# EAGLE board motor-board (EAGLE 9.4.0)
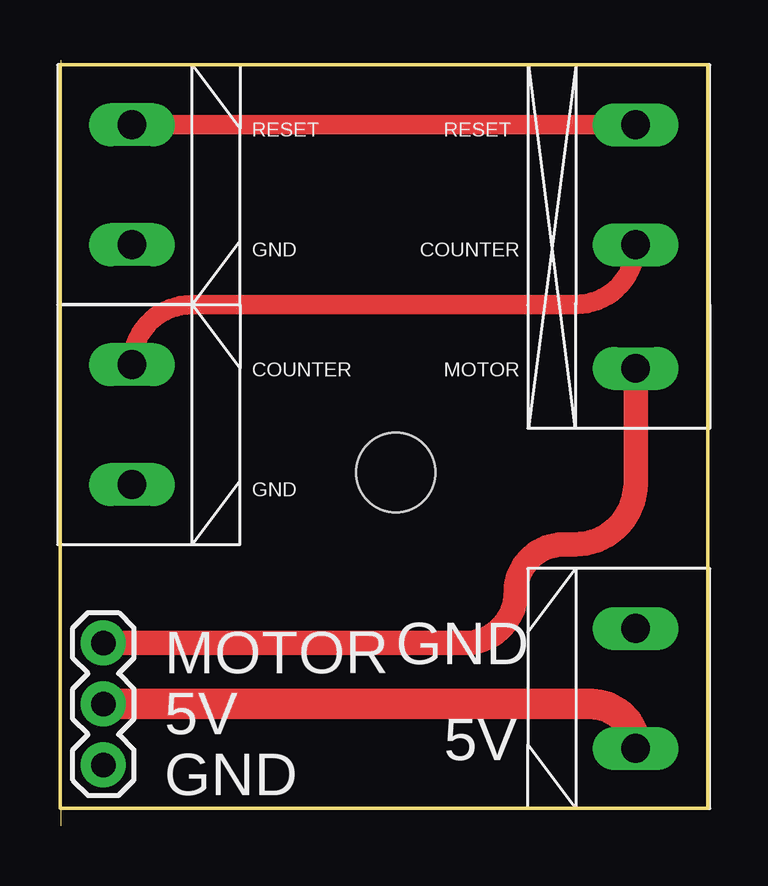
[diagram p0: board, top side]
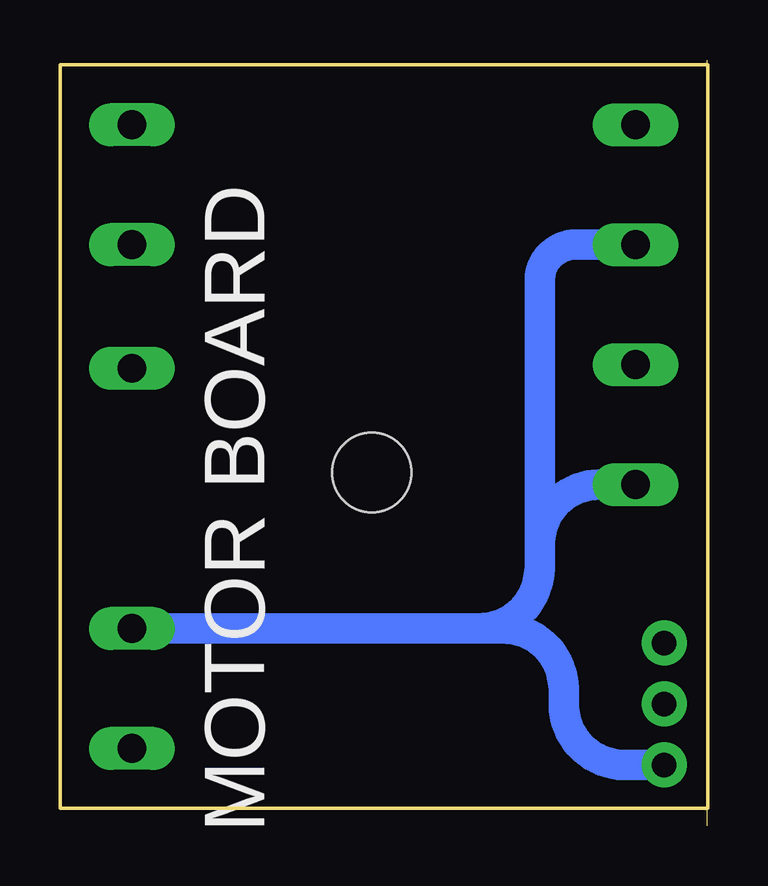
[diagram p1: board, bottom side, seen from below]

Size 27 x 31.93 mm. Coordinates in mm from the lower left corner, seen from the top.
Outline: 0.03,31.93 0.03,0
Outline: 0,0.73 27,0.73 27,31.73 0,31.73 0,0.73
Copper layers (1*16): Top 0.0356mm / dielectric 1.5011mm / Bottom 0.0356mm
Design rules "oshpark-2layer": minimum track width 6mil, minimum drill 13mil, track to track 6mil, track to pad 6mil, pad to pad 6mil, via to via 6mil, smd to smd 6mil, copper to edge 15mil, drill to drill 6mil, minimum pad ring 7mil, minimum via ring 7mil, stop-mask expansion 2.5mil, vias tented up to drill 0mil, thermal gap 10mil

## Footprints (pad centres in the part's own frame; a part is rotated, then mirrored left to right if it is on the bottom)
1X03 = drill 1.016 pad 1.88: 1 0,0; 2 2.54,0; 3 5.08,0
KF301-2P = drill 1.2 pad 1.778 long: 1 -2.5,0; 2 2.5,0
KF301-3P = drill 1.2 pad 1.778 long: 1 -2.5,0; 2 2.5,0; 3 7.66,0
STAND-OFF = hole 3.302: 0,0

## Placement (x,y rotation side)
FRAME1  FRAME-LETTERNO_PACKAGE  [DUMMY]  -15.97,17.78 0 top  (outside the outline)
J1  [1X03]  1.81,2.54 90 top
U$1  TERMINAL_2P  [KF301-2P]  3,16.73 90 top
U$2  TERMINAL_2P  [KF301-2P]  3,26.73 90 top
U$3  TERMINAL_2P  [KF301-2P]  24,5.73 270 top
U$4  KF301-3P  [KF301-3P]  24,26.73 270 top
U$7  [STAND-OFF]  14,14.73 0 top

## Library data of the parts
FRAME1 = SparkFun-Aesthetics; DESIGNER: Nobody; VERSION: v01
J1 = SparkFun-Connectors
U$1-U$3 = KF301-2P-Terminal
U$4 = KF301-3P
U$7 = SparkFun-Hardware

## Nets
5V: J1.2 U$3.2
COUNTER: U$1.2 U$4.2
GROUND: J1.1 U$1.1 U$2.1 U$3.1
MOTOR: J1.3 U$4.3
RESET: U$2.2 U$4.1

## Tracks (layer width: path | path; a pad name or v marks a point on that pad's centre or on a via)
5V
  Top 1.27: J1.2 22.15,5.08 arc-90 U$3.2
COUNTER
  Top 0.813: U$1.2 arc-90 5.5,21.73 21.5,21.73 arc90 U$4.2
GROUND
  Bottom 1.27: U$3.1 9.54,8.23 | 9.54,8.23 arc-90 7,10.77 7,11.73 | 7,11.73 7,22.73 arc90 5.5,24.23 U$2.1 | 9.54,8.23 8.54,8.23 arc90 6,5.69 6,5.08 arc-90 3.46,2.54 J1.1 | U$1.1 4.5,14.23 arc-90 7,11.73
MOTOR
  Top 1.016: U$4.3 24,14.27 arc-90 21.46,11.73 21,11.73 arc90 19,9.73 arc-90 16.89,7.62 J1.3
RESET
  Top 0.813: U$2.2 U$4.1

## Text on the board
tPlace: RESET | RESET | GND | COUNTER | COUNTER | MOTOR | GND | MOTOR | GND | 5V | 5V | GND
bPlace: MOTOR BOARD